# Altium PCB mchf_pro_ui.PcbDoc (part 7 of 7)
Units mil, origin at the board's own origin, x right, y up, seen from the top; angles counter-clockwise.
Board outline 7877.73 x 5661.04 mil, 2 copper layers (Top Layer, Bottom Layer); 345 components, 345 nets, 1318 pads, 783 vias.
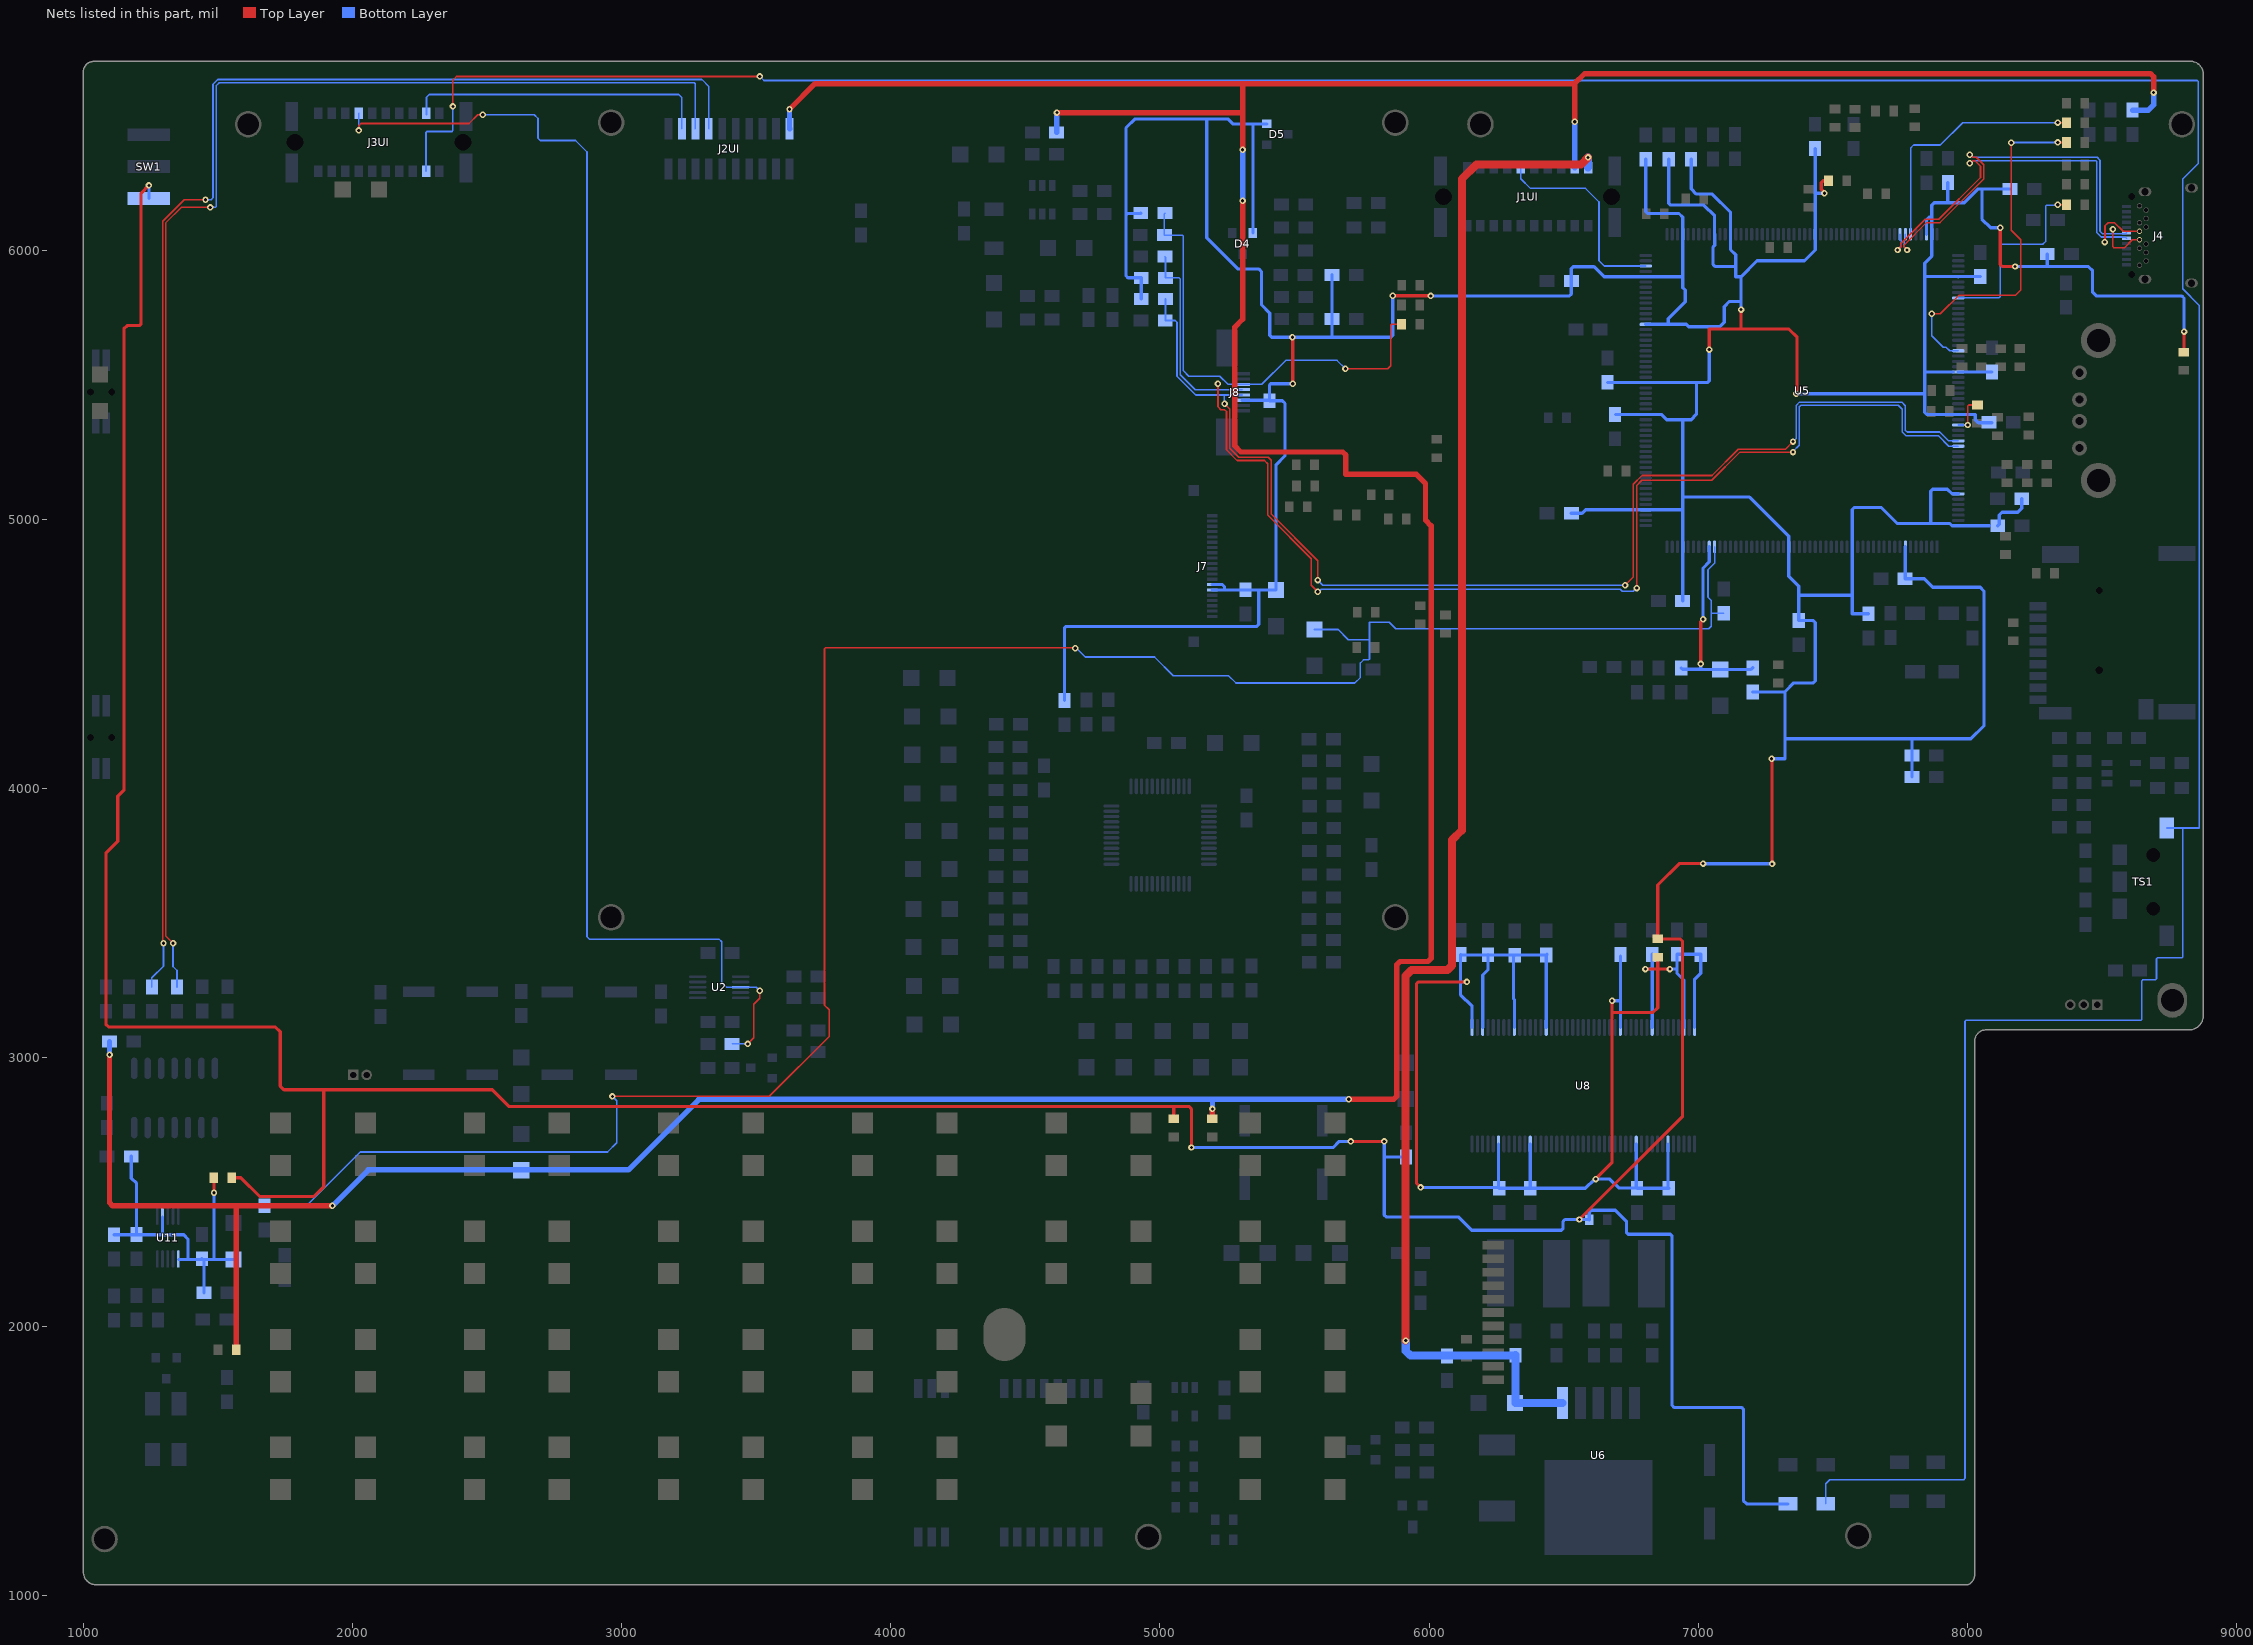
[diagram p6: the nets of this part, all layers, seen from the top]

## Via types
v1: diameter 24, hole 12, Top Layer to Bottom Layer, 779 vias
v2: diameter 30, hole 15, Top Layer to Bottom Layer, 4 vias

## Nets (pads, with @x,y where several pads share a name; then routed paths per layer and width w, separated by ;. In a path a pad name is that pad's centre, name@x,y a point inside that pad or via, vN(x,y) a via of type N, cw(c..) or ccw(c..) an arc to the next point about the centre after c; other vN are vias at no path point) (continued)
SPK_RET: J3UI.A14 R10.2 U2.3 | length 5050.5
  Top Layer w6: v1(2023.3,6445.41) 2023.35,6445.46 2023.35,6462.89 2031.49,6471.03 2432.65,6471.03 2465.55,6503.94 v1(2484.25,6503.94) ; v1(3468.5,3051.18) 3491.06,3073.74 3491.06,3198.94 3512.8,3220.67 v1(3512.8,3249.02)
  Bottom Layer w6: J3UI.A14@2023.03,6509.84 2023.3,6509.57 v1(2023.3,6445.41) ; v1(2484.25,6503.94) 2675.2,6503.94 2689.2,6489.94 2689.2,6416.47 2697.83,6407.83 2828.37,6407.83 2871.06,6365.13 2871.06,3449.33 2879.59,3440.8 3361.82,3440.8 3372.24,3430.38 3372.24,3279.33 3389.76,3261.81 U2.3@3441.93,3261.81 3499.74,3261.81 3512.54,3249.02 v1(3512.8,3249.02) ; R10.2@3410.43,3051.18 v1(3468.5,3051.18)
SWCLK: M3.2 U5.165 | length 734.3
  Top Layer w6: v1(8335.63,6169.58) M3.2@8368.61,6169.58
  Bottom Layer w6: U5.165@7966.5,5823.4 8117.64,5823.4 8122.03,5827.79 8122.03,6018.52 8125.55,6022.03 8279.95,6022.03 8290.74,6032.82 8290.74,6164.43 8294.26,6167.94 8333.99,6167.94 v1(8335.63,6169.58)
SWDIO: M3b.2 U5.151 | length 939
  Top Layer w6: v1(8335.63,6474.41) M3b.2@8368.61,6474.41
  Bottom Layer w6: U5.151@7789.34,6059.62 7789.34,6380.37 7800.2,6391.23 7899.65,6391.23 7982.82,6474.41 v1(8335.63,6474.41)
SWO: M24.2 U5.189 | length 143.3
  Top Layer w6: v1(8001.29,5350.96) 8001.29,5421.81 8004.81,5425.32 M24.2@8037.52,5425.32
  Bottom Layer w6: U5.189@7966.5,5350.96 v1(8001.29,5350.96)
TOUCH_INT: C50.1 J8.6 M11.1 R49.2 | length 1692.5
  Top Layer w6: v1(5689.32,5559.58) 5846.71,5559.58 5857.85,5570.72 5857.85,5721.46 5861.37,5724.98 M11.1@5897.53,5724.98
  Bottom Layer w6: R49.2@5018.7,6138.05 5016.73,6136.08 C50.1@5016.73,6056.35 5083.74,6056.35 5087.25,6052.84 5087.25,5552.74 5107.42,5532.58 5222.5,5532.58 5253.11,5501.97 J8.6@5306.22,5501.97 5378.09,5501.97 5466.96,5590.84 5658.07,5590.84 v1(5689.32,5559.58)
TOUCH_SCK: C49.2 J8.4 R47.2 U5.192 | length 4549.6
  Top Layer w6: v1(5240.06,5429.7) 5240.06,5429.51 5259.14,5410.44 5259.14,5265 5293.06,5231.07 5401.93,5231.07 5413.34,5219.66 5413.34,5020.17 5586.61,4846.9 v1(5586.61,4774.61) ; v1(6728.35,4755.91) 6758.37,4785.93 6758.37,5130.31 6791.45,5163.39 7051.08,5163.39 7148.71,5261.01 7323.99,5261.01 v1(7352.25,5289.28)
  Bottom Layer w6: R47.2@5020.77,5819.14 5020.77,5739.68 C49.2@5020.09,5739 5056.59,5739 5063.25,5732.34 5063.25,5532.58 5133.23,5462.6 5239.47,5462.6 ; v1(5240.06,5429.7) 5239.47,5430.29 5239.47,5462.6 ; J8.4@5306.22,5462.6 5239.47,5462.6 ; v1(5586.61,4774.61) 5605.32,4755.91 v1(6728.35,4755.91) ; v1(7352.25,5289.28) 7363.95,5300.97 7363.95,5423.28 7376.7,5436.02 7756.27,5436.02 7769.65,5422.65 7769.65,5331.28 7776.12,5324.81 7897.53,5324.81 7927.08,5295.26 7930.43,5291.91 U5.192@7966.5,5291.91
TOUCH_SDA: C48.2 J8.5 R48.2 U5.193 | length 4855.4
  Top Layer w6: v1(5215.6,5504.01) 5215.6,5418.51 5226.12,5407.98 5240.03,5407.98 5247.14,5400.88 5247.14,5258.62 5286.68,5219.07 5388.45,5219.07 5400.41,5207.11 5400.41,5016.13 5562.32,4854.22 5562.32,4755.59 v1(5586.61,4731.3) ; v1(6771.49,4745.1) 6771.49,5126.46 6790.67,5145.64 7050.3,5145.64 7153.68,5249.01 7351.09,5249.01 v1(7352.25,5250.18)
  Bottom Layer w6: C48.2@5018.7,5976.69 5020.67,5974.73 R48.2@5020.67,5897.83 5070.81,5897.83 5075.25,5893.38 5075.25,5537.78 5130.75,5482.28 5214.57,5482.28 ; v1(5215.6,5504.01) 5215.6,5483.32 5214.57,5482.28 ; J8.5@5306.22,5482.28 5214.57,5482.28 ; v1(5586.61,4731.3) 5589.94,4731.3 5599.13,4740.49 6710.8,4740.49 6717.93,4733.36 6758.98,4733.36 6770.72,4745.1 v1(6771.49,4745.1) ; v1(7352.25,5250.18) 7352.25,5252.19 7375.95,5275.89 7375.95,5418.31 7381.67,5424.02 7743.49,5424.02 7757.65,5409.87 7757.65,5324.81 7770.87,5311.59 7891.49,5311.59 7930.86,5272.22 U5.193@7966.5,5272.22
TX_CLK_N: J2UI.A8 M58.1 | length 5471
  Top Layer w6: v1(1333.09,3425.42) 1306.68,3451.83 1306.68,6103.08 1363.05,6159.45 v1(1471.47,6159.45)
  Bottom Layer w6: v1(1333.09,3425.42) 1333.09,3339.02 1347.8,3324.31 M58.1@1347.8,3262.67 ; v1(1471.47,6159.45) 1472.38,6160.35 1490.78,6160.35 1494.3,6163.87 1494.3,6612.23 1504.74,6622.68 3270.07,6622.68 3273.58,6619.16 3273.58,6452.21 J2UI.A8@3273.82,6451.97
TX_CLK_P: J2UI.A7 M57.1 | length 5526.6
  Top Layer w6: v1(1297.57,3425.05) 1294.68,3427.93 1294.68,6108.06 1374.62,6187.99 v1(1453.74,6187.99)
  Bottom Layer w6: M57.1@1254.46,3262.67 1254.46,3296.81 1297.57,3339.91 v1(1297.57,3425.05) ; v1(1453.74,6187.99) 1474.68,6187.99 1481.48,6194.78 1481.48,6616.56 1499.6,6634.68 3298.09,6634.68 3324.02,6608.76 3324.02,6452.17 J2UI.A7@3323.82,6451.97
TX_MIX: J2UI.A9 J3UI.A19 | length 1137
  Bottom Layer w6: J3UI.A19@2274.8,6504.7 2274.8,6568.67 2284.89,6578.75 3211.9,6578.75 3223.14,6567.51 3223.14,6452.64 J2UI.A9@3223.82,6451.97
UI_3V_LO: C54.1 C55.1 M52.2 M54.2 R53.2 R54.2 RFC7.2 U11.1 U11.7 | length 1349.5
  Top Layer w12: v1(1485.21,2498.6) M52.2@1485.21,2554.01
  Bottom Layer w12: R54.2@1113.86,2342.17 1372.61,2342.17 1388.72,2326.06 1388.72,2252.66 1386.37,2250.31 ; M54.2@1177.72,2633.56 1177.86,2633.42 1177.86,2552.55 1197.55,2532.86 R53.2@1197.55,2343.23 ; 1293.72,2344.5 U11.7@1293.72,2407.7 ; U11.1@1353.86,2250.31 1386.37,2250.31 ; RFC7.2@1447.78,2126.54 C54.1@1447.78,2245.33 ; v1(1485.21,2498.6) 1485.21,2250.31 ; C55.1@1557.09,2250.31 1485.21,2250.31 ; 1386.37,2250.31 1440.09,2250.31 C54.1@1440.09,2253.03 1442.8,2250.31 1485.21,2250.31
UI_3V_MCU: C46.2 C47.1 C51.2 Cp7.1 Cp17.1 Cp29.1 Cp49.1 Cp56.1 Cp74.1 Cp80.1 Cp100.1 Cp108.1 Cp114.1 Cp117.1 Cp133.1 Cp155.1 Cp161.1 Cp179.1 Cp187.1 Cp208.1 D4.2 D5.2 D6.1 J7.6 J7.7 J8.3 M0.2 M4.1 M48.1 M49.2 M50.1 M51.1 M52.1 R1a.2 R1b.2 R21a.2 R21b.2 R23a.2 R32.1 R33.1 R35a.2 R47.1 R48.1 R49.1 RFC3.1 SW1.3 U5.7 U5.17 U5.29 U5.49 U5.56 U5.74 U5.80 U5.91 U5.100 U5.108 U5.114 U5.117 U5.133 U5.154 U5.155 U5.161 U5.179 U5.187 U5.202 U5.208 | length 36675.2
  Top Layer w12: v1(1243.5,6241.14) 1243.5,6240.97 1214.16,6211.63 1214.16,5727.28 1207.13,5720.25 1162.18,5720.25 1150.35,5708.43 1150.35,3994.1 1127.95,3971.7 1127.95,3804.13 1083.66,3759.84 1083.66,3124.02 1093.5,3114.17 1713.58,3114.17 1731.3,3096.46 1731.3,2894.68 1745.08,2880.91 1888.78,2880.91 ; M52.1@1551.92,2554.01 1584.77,2554.01 1654.53,2484.25 1856.3,2484.25 1892.72,2520.67 1892.72,2876.97 1888.78,2880.91 ; M51.1@5051.18,2772.92 5051.18,2818.94 ; v1(5117.08,2666.34) 5117.08,2809.75 5107.89,2818.94 5051.18,2818.94 ; v1(5492.13,5676.94) 5493.11,5675.95 v1(5493.11,5504.01) ; v1(5708.66,2688.98) v1(5833.66,2688.98) ; v1(5865.2,5831.34) 5865.42,5831.34 5865.92,5830.84 6005.84,5830.84 v1(6006.34,5830.34) ; v1(6558.45,2398.81) 6942.01,2782.37 6942.01,3431.71 6932.36,3441.36 M50.1@6849.39,3441.36 6849.39,3641.87 6928.93,3721.42 v1(7018,3721.42) ; v1(7041.31,5631.28) 7041.31,5707.66 7159.42,5707.66 ; v1(7159.42,5779.78) 7159.42,5707.66 ; v1(7272.43,4111.12) 7274.39,4109.16 v1(7274.39,3720.11) ; v1@7367.52,5479.05 7367.52,5676.78 7336.65,5707.66 7159.42,5707.66 ; v1(7468.95,6211.95) 7468.95,6215.2 7457.52,6226.62 7457.52,6251.44 7464.55,6258.47 M48.1@7484.06,6258.47 ; v1(8122.03,6083.62) 8122.03,5946.89 8129.06,5939.86 v1(8177.41,5939.86) ; M4.1@8803.95,5621.35 8805.12,5622.52 v1(8805.12,5698.06) ; 1888.78,2880.91 2518.88,2880.91 2580.84,2818.94 5051.18,2818.94
  Bottom Layer w12: SW1.3@1243.5,6192.91 v1(1243.5,6241.14) ; M0.2@4644.93,4327.51 4644.93,4595.52 4651.96,4602.55 5360.52,4602.55 5367.55,4609.58 5367.55,4738.19 ; R49.1@4928.7,6138.05 4927.46,6136.81 4880.99,6136.81 4873.96,6129.78 ; R47.1@4930.77,5819.14 4930.77,5897.72 R48.1@4930.67,5897.83 4880.99,5897.83 4873.96,5904.85 4873.96,6129.78 ; v1(5117.08,2666.34) 5643.7,2666.34 5666.34,2688.98 v1(5708.66,2688.98) ; J7.6@5193.86,4738.19 5239.47,4738.19 ; J7.7@5193.86,4757.87 5232.44,4757.87 5239.47,4750.84 5239.47,4738.19 ; J8.3@5306.22,5442.91 5405.49,5442.91 C51.2@5407.19,5441.21 ; D4.2@5345.67,6064.33 5345.67,6469.69 ; D5.2@5396.65,6469.69 5345.67,6469.69 ; v1(5493.11,5504.01) 5411.52,5504.01 5407.19,5499.69 C51.2@5407.19,5441.21 ; R21b.2@5639.62,5908.81 R21a.2@5639.62,5744.66 5639.62,5679.84 5636.72,5676.94 ; v1(5833.66,2688.98) 5833.66,2628.42 ; v1(5865.2,5831.34) 5865.42,5831.12 5865.42,5683.97 5858.39,5676.94 5636.72,5676.94 ; R35a.2@5913.61,2631.32 5836.56,2631.32 5833.66,2628.42 ; v1(6006.34,5830.34) 6521.64,5830.34 6528.67,5837.37 Cp100.1@6528.67,5885.3 6528.67,5931.97 6535.7,5939 6613.26,5939 6650.11,5902.14 U5.100@6805.08,5902.14 6942.73,5902.15 6942.88,5902.3 ; Cp56.1@6528.67,5023 6568.7,5023 6581.7,5036 U5.56@6805.08,5036 6942.88,5036 ; M49.2@6595.19,2398.33 M49.2@6595.19,2398.81 ; Cp80.1@6663.76,5508.44 U5.80@6805.08,5508.44 6993.52,5508.44 ; Cp74.1@6692.27,5390.33 U5.74@6805.08,5390.33 6863.45,5390.33 6883.13,5370.65 6939.34,5370.65 ; U5.91@6805.08,5724.98 6888.62,5724.98 ; Cp108.1@6805.08,6338.18 6805.43,6337.84 6805.43,6143.84 6812.46,6136.81 6928.69,6136.81 6942.88,6122.62 U5.108@6942.88,6059.62 6942.88,5902.3 ; Cp114.1@6890.52,6338.18 6890.52,6174.97 6897.55,6167.94 7021.37,6167.94 7060.99,6128.32 U5.114@7060.99,6059.62 7061.08,6059.53 7061.08,6018.68 7055.18,6012.78 7055.18,5947.04 7062.21,5940.01 7139.73,5940.01 ; Cp49.1@6942.88,4698.22 U5.49@6942.88,4898.21 6942.88,5036 ; Cp117.1@6973.84,6338.18 6973.84,6228.69 6993.52,6209 7052.34,6209 7120.05,6141.3 U5.117@7120.05,6059.62 7120.05,6002.78 7139.73,5983.1 7139.73,5940.01 ; v1(7018,3721.42) 7018.65,3720.76 7273.74,3720.76 v1(7274.39,3720.11) ; v1@7041.31,5626.55 7041.31,5515.47 7034.28,5508.44 6993.52,5508.44 ; v1(7159.42,5779.78) 7159.42,5809.78 ; RFC3.1@7202.53,4358.59 7321.09,4358.59 7322.48,4359.98 ; v1(7272.43,4111.12) 7322.48,4111.12 7322.48,4184.78 ; D6.1@7334.14,1342.06 7180.63,1342.06 7168.16,1354.53 7168.16,1693.76 7161.13,1700.79 6909.89,1700.79 6902.86,1707.82 6902.86,2337.21 6895.83,2344.24 6740.39,2344.24 6733.36,2351.27 6733.36,2393 6692.54,2433.83 6692,2433.29 6602.45,2433.29 6595.19,2426.02 M49.2@6595.19,2398.81 ; v1@7364.79,5467.05 7841.36,5467.05 ; Cp133.1@7434.45,6378.31 7435.01,6377.75 U5.133@7435.01,6059.62 7435.01,6001.13 7395.08,5961.21 7218.48,5961.21 7159.42,5902.14 ; 7435.38,6211.95 v1(7468.95,6211.95) ; Cp17.1@7632.78,4649.9 7572.8,4649.9 7572.8,4717.96 ; U5.7@7769.65,4898.21 7769.65,4780.5 Cp7.1@7768.8,4779.64 7839.87,4779.64 7871.62,4747.89 8048,4747.89 8062.01,4733.89 8062.01,4233.72 8013.07,4184.78 7794.47,4184.78 ; R1b.2@7794.47,4043.17 R1a.2@7794.47,4123.12 7794.47,4184.78 ; U5.154@7848.39,6059.62 7848.39,6113.19 7857.82,6122.62 7868.08,6122.62 ; Cp155.1@7927.63,6251.71 7927.63,6183.86 7920.6,6176.83 ; U5.179@7948.88,5547.72 7841.36,5547.72 ; U5.202@7966.5,5095.06 7966.41,5095.15 7943.05,5095.15 7925.62,5112.58 7871,5112.58 7863.97,5105.55 7863.97,4984.93 ; U5.179@7966.5,5547.81 Cp179.1@8091.98,5547.81 ; Cp161.1@8048.11,5902.24 7966.59,5902.24 U5.161@7966.5,5902.14 7966.34,5902.3 7841.36,5902.3 ; 8082.58,4976.95 U5.208@7966.5,4976.95 7943.15,4976.95 7935.17,4984.93 7863.97,4984.93 ; Cp187.1@8091.98,5359.39 8040.98,5359.39 8029.72,5370.65 8029.72,5390.33 7848.39,5390.33 7841.36,5397.36 7841.36,5467.05 ; Cp208.1@8113.02,4976.72 8118.52,4982.23 8118.52,5016.54 8128.77,5026.78 8187.52,5026.78 8202.16,5041.42 R33.1@8202.16,5077 ; v1(8122.03,6083.62) 8086.55,6083.62 8054.23,6115.95 8054.23,6228.16 ; R32.1@8158.41,6228.16 8054.23,6228.16 ; v1(8177.41,5939.86) 8297.48,5939.86 ; R23a.2@8296.96,5986.02 8296.96,5940.39 8297.48,5939.86 ; v1(8805.12,5698.06) 8805.12,5822.85 8798.09,5829.88 8480.16,5829.88 8465.55,5844.49 8465.55,5924.21 8449.9,5939.86 8297.48,5939.86 ; 4873.96,6129.78 4873.96,6454.66 4907.48,6488.19 5174.15,6488.19 ; 5174.15,6488.19 5174.15,6047.07 5291.14,5930.08 5368.36,5930.08 5377.33,5921.11 5377.33,5797.24 5408.03,5766.55 5408.03,5683.97 5415.06,5676.94 v1(5492.13,5676.94) 5636.72,5676.94 ; 5174.15,6488.19 5251.69,6488.19 5270.19,6469.69 5345.67,6469.69 ; 5239.47,4738.19 5367.55,4738.19 ; 5367.55,4738.19 C47.1@5431.4,4738.19 5431.4,5203.7 5464.57,5236.87 5464.57,5430.97 5454.34,5441.21 C51.2@5407.19,5441.21 ; 5833.66,2628.42 5833.66,2415.36 5840.69,2408.33 6108.81,2408.33 6157.88,2359.25 6490.82,2359.25 6497.85,2366.28 6497.85,2391.78 6504.88,2398.81 v1(6558.45,2398.81) M49.2@6595.19,2398.81 ; 6888.62,5724.98 6888.62,5746.02 6951.49,5808.89 6951.49,5852.47 6942.88,5861.08 6942.88,5902.3 ; 6888.62,5724.98 6955.86,5724.98 6964.63,5716.21 7080.68,5716.21 7096.6,5732.13 7096.6,5790.7 7115.68,5809.78 7159.42,5809.78 ; 6939.34,5370.65 6942.88,5367.11 6942.88,5083.22 ; 6939.34,5370.65 6973.84,5370.65 6993.52,5390.33 6993.52,5508.44 ; 6942.88,5036 6942.88,5083.22 ; 6942.88,5083.22 7191.09,5083.22 7336.58,4937.72 U5.29@7336.58,4898.21 7336.65,4898.14 7336.65,4788.94 7373.92,4751.66 7373.92,4714 ; 7139.73,5940.01 7139.73,5902.14 7159.42,5902.14 ; 7159.42,5809.78 7159.42,5902.14 ; 7322.48,4184.78 7794.47,4184.78 ; 7322.48,4184.78 7322.48,4359.98 ; 7322.48,4359.98 7355.28,4392.78 7427.98,4392.78 7435.01,4399.81 7435.01,4617.07 7427.98,4624.1 Cp29.1@7373.7,4624.1 7373.7,4692.79 7373.92,4693.01 7373.92,4714 ; 7373.92,4714 7377.88,4717.96 7572.8,4717.96 ; 7572.8,4717.96 U5.17@7572.8,4898.21 7572.8,5036.91 7580.18,5044.29 7680.09,5044.29 7739.45,4984.93 7863.97,4984.93 ; 7841.36,5467.05 7841.36,5547.72 ; 7841.36,5547.72 7841.36,5902.3 ; 7841.36,5902.3 7841.36,5951.95 7868.08,5978.66 7868.08,6122.62 ; 7868.08,6122.62 7868.08,6167.94 7876.96,6176.83 7920.6,6176.83 ; 7920.6,6176.83 7988.78,6176.83 8040.12,6228.16 8054.23,6228.16
  other v1: 7364.79,5467.84
UI_3V_SDRAM: Cr1.1 Cr3.1 Cr9.1 Cr15.1 Cr29.1 Cr35.1 Cr41.1 Cr43.1 Cr49.1 Cr55.1 Cr75.1 Cr81.1 M50.2 U8.1 U8.3 U8.9 U8.15 U8.29 U8.35 U8.41 U8.43 U8.49 U8.55 U8.75 U8.81 | length 6435.2
  Top Layer w12: v1(5968.58,2518) 5953.21,2533.37 5953.21,3274.57 5960.24,3281.6 v1(6140.52,3281.6) ; v1(6619.17,2549.21) 6619.17,2550.04 6680.08,2610.94 6680.08,3170.26 ; v1(6680.08,3211.95) 6680.08,3170.26 ; v1(6803.85,3329.51) 6803.92,3329.44 6849.39,3329.44 ; M50.2@6849.39,3373.86 6849.39,3329.44 ; v1(6894.85,3329.44) 6849.39,3329.44 ; 6680.08,3170.26 6682.23,3168.11 6831.89,3168.11 6849.39,3185.6 6849.39,3329.44
  Bottom Layer w12: v1(5968.58,2518) 6257.85,2518 Cr81.1@6260.62,2515.23 6258.12,2517.73 U8.81@6258.12,2679.53 ; v1(6140.52,3281.6) 6116.3,3281.6 ; U8.1@6159.69,3112.61 6159.69,3191.07 6116.3,3234.46 6116.3,3281.6 ; U8.3@6199.06,3112.61 6199.06,3307.29 6218.97,3327.2 Cr3.1@6218.97,3381.64 ; Cr3.1@6218.97,3382.49 Cr3.1@6218.97,3381.64 ; Cr81.1@6260.84,2515.23 Cr75.1@6376,2515.23 6580.87,2515.23 6614.85,2549.21 v1(6619.17,2549.21) 6671.3,2549.21 6704.43,2516.09 Cr55.1@6772.12,2516.09 ; U8.9@6317.17,3112.61 6317.17,3216.13 6314.01,3219.29 6314.01,3376.28 Cr9.1@6318.52,3380.78 ; Cr75.1@6376.23,2516.09 U8.75@6376.23,2679.53 ; U8.15@6435.28,3112.61 6435.28,3381.42 Cr15.1@6435.5,3381.64 ; Cr15.1@6438.65,3384.78 Cr15.1@6435.5,3381.64 ; v1(6680.08,3211.95) 6706.36,3211.95 6710.87,3207.44 ; U8.29@6710.87,3112.61 6710.87,3207.44 ; Cr29.1@6710.87,3378.35 6710.87,3207.44 ; U8.55@6769.93,2679.53 6769.93,2518.28 Cr55.1@6772.12,2516.09 ; v1(6803.85,3329.51) 6828.98,3329.51 ; U8.35@6828.98,3112.61 6828.98,3329.51 ; Cr35.1@6828.98,3384.78 6828.98,3329.51 ; Cr49.1@6888.04,2517.81 U8.49@6888.04,2679.53 ; Cr49.1@6890.61,2515.23 6772.98,2515.23 Cr55.1@6772.12,2516.09 ; v1(6894.85,3329.44) 6921.23,3329.44 6921.3,3329.51 ; U8.41@6947.09,3112.61 6947.09,3288.38 6921.3,3314.18 6921.3,3329.51 ; U8.43@6986.46,3112.61 6986.46,3291.34 7009.3,3314.18 7009.3,3384.78 Cr41.1@6921.52,3384.78 6921.3,3384.78 6921.3,3329.51 ; 6116.3,3281.6 Cr1.1@6116.3,3383.93 6118.59,3381.64 Cr3.1@6218.97,3381.64 ; Cr3.1@6218.97,3381.64 Cr15.1@6435.5,3381.64
USART2_TX: M3a.2 U5.175 | length 1337.5
  Top Layer w6: v1(7868.08,5764.35) 7899.86,5764.35 7968.99,5833.48 8179.31,5833.48 8198.41,5852.58 8198.41,6039.3 8163.2,6074.51 v1(8163.2,6399.24) ; v1(8335.63,6400.77) M3a.2@8368.61,6400.77
  Bottom Layer w6: v1(7868.08,5764.35) 7868.08,5682.73 7910.48,5640.33 7920.78,5640.33 7934.56,5626.55 U5.175@7966.5,5626.55 ; v1(8163.2,6399.24) 8164.73,6400.77 v1(8335.63,6400.77)
USB_DFU_N: J4.A7 J4.B7 U5.149 | length 1673.8
  Top Layer w6: v1(7740.72,6001.21) 7740.72,6002.02 7752.42,6013.72 7752.42,6024.1 7843.27,6114.95 7893.75,6114.95 8049.06,6270.27 8049.06,6312.45 8028.23,6333.29 8021.07,6333.29 8011.05,6323.26 v1(8008.56,6323.26) ; v1(8510.83,6030.51) 8511.67,6031.35 8511.67,6091.1 8523.11,6102.55 8547.02,6102.55 8578.9,6070.68 J4.B7@8639.72,6070.68
  Bottom Layer w6: v1(7740.72,6001.21) 7740.72,6002.02 7752.42,6013.72 7752.42,6025.61 7753.81,6027 7753.81,6036.49 7749.97,6040.33 U5.149@7749.97,6059.62 ; v1(8008.56,6323.26) 8011.05,6323.26 8021.07,6333.29 8477.22,6333.29 8480.74,6329.77 8480.74,6066.21 8497.37,6049.58 8510.83,6049.58 ; v1(8510.83,6030.51) 8510.83,6049.58 ; J4.A7@8591.18,6045.08 8588.27,6047.98 8574.87,6047.98 8573.27,6049.58 8510.83,6049.58
USB_DFU_P: J4.A6 J4.B6 U5.150 | length 1660.9
  Top Layer w6: v1(7776.12,6001.13) 7776.12,6001.95 7764.42,6013.65 7764.42,6019.13 7848.24,6102.95 7898.72,6102.95 8061.06,6265.29 8061.06,6317.42 8033.2,6345.29 8021.07,6345.29 8011.05,6355.31 v1(8008.56,6355.31) ; v1(8540.99,6078.14) 8540.99,6013.5 8544.51,6009.98 8583.71,6009.98 8613.04,6039.3 8639.6,6039.3 J4.B6@8639.72,6039.18
  Bottom Layer w6: U5.150@7769.65,6059.62 7769.65,6040.33 7765.81,6036.49 7765.81,6022.03 7764.42,6020.64 7764.42,6013.65 7776.12,6001.95 v1(7776.12,6001.13) ; v1(8008.56,6355.31) 8011.05,6355.31 8021.07,6345.29 8482.19,6345.29 8492.74,6334.74 8492.74,6071.18 8502.34,6061.58 8541.13,6061.58 ; v1(8540.99,6078.14) 8541.13,6078 8541.13,6061.58 ; J4.A6@8591.18,6064.76 8588.27,6061.86 8573,6061.86 8572.72,6061.58 8541.13,6061.58
VBAT: D7.1 J3UI.A9 TS1.e | length 13691.2
  Top Layer w6: v1(2373.06,6534.46) 2373.06,6632.69 2386.04,6645.67 3512.64,6645.67 v1(3513.27,6646.3)
  Bottom Layer w6: J3UI.A9@2273.03,6293.31 2273.03,6437.77 2276.55,6441.29 2369.55,6441.29 2373.06,6444.8 v1(2373.06,6534.46) ; v1(3513.27,6646.3) 3528.74,6630.82 8854.28,6630.82 8857.8,6627.31 8857.8,6322.36 8800.29,6264.86 8800.29,5856.85 8862.1,5795.04 8862.1,3853.54 8800.2,3853.54 ; D7.1@7473.63,1342.06 7473.63,1417.53 7488.4,1432.29 7986.17,1432.29 7991.1,1437.23 7991.1,3135.24 7995.66,3139.8 8645.11,3139.8 8648.62,3143.31 8648.62,3285.75 8652.14,3289.26 8699.24,3289.26 8702.76,3292.78 8702.76,3367.58 8706.27,3371.09 8796.68,3371.09 8800.2,3374.61 8800.2,3853.54 ; TS1.e@8741.14,3853.54 8800.2,3853.54
VCC_5V_ON: J1UI.A6 U5.102 | length 768.2
  Bottom Layer w6: J1UI.A6@6341.04,6307.32 6341.04,6265.68 6376.72,6230 6581.02,6230 6631.36,6179.67 6631.36,5960.81 6650.66,5941.51 U5.102@6805.08,5941.51
VCC_5V_RF: J1UI.A2 J2UI.A1 M2.1 M53.2 M59.2 R16.1 RFC2.1 RFC5.1 | length 17191.5
  Top Layer w20: v1(1097.05,3010.83) 1096.94,3010.72 1096.94,2461.52 1108.65,2449.8 1567.48,2449.8 ; M59.2@1567.48,1915.07 1567.48,2449.8 ; v1(1925.2,2449.8) 1567.48,2449.8 ; v1(3623.53,6524.07) 3718.55,6619.09 5307.09,6619.09 ; v1(4617.13,6511.81) 5307.09,6511.81 ; M2.1@5194.67,2772.92 5194.88,2773.14 5194.88,2809.53 v1(5195.1,2809.75) ; v1@5307.09,6180.12 5307.09,5743.93 5278.14,5714.98 5278.14,5272.87 5300.36,5250.64 5679.3,5250.64 5691.02,5238.93 5691.02,5167.66 5952.53,5167.66 5986.61,5133.59 5986.61,4997.64 6007.87,4976.38 6007.87,3369.32 5996.16,3357.6 5892.05,3357.6 5880.34,3345.88 5880.34,2857.19 5868.62,2845.47 v1(5701.77,2845.47) ; v1(5307.09,6374.02) 5307.09,6511.81 ; v1(6541.04,6477.41) 6540.86,6477.59 6540.86,6619.09 ; v1(8692.15,6585.95) 8692.15,6644.88 8680.44,6656.59 6578.53,6656.59 6541.04,6619.09 6540.86,6619.09 ; 5307.09,6511.81 5307.09,6619.09 ; 5307.09,6619.09 6540.86,6619.09
  Bottom Layer w20: v1(1097.05,3010.83) M53.2@1097.05,3059.79 ; v1(1925.2,2449.8) 2058.93,2583.53 3024.91,2583.53 3286.85,2845.47 5195.1,2845.47 ; v1(3623.53,6524.07) 3623.53,6452.26 J2UI.A1@3623.82,6451.97 ; RFC5.1@4616.04,6437.68 4616.58,6438.22 4616.58,6511.27 v1(4617.13,6511.81) ; v1(5195.1,2809.75) 5195.1,2845.47 ; v1(5307.09,6184.43) v1(5307.09,6374.02) ; v1(5701.77,2845.47) 5195.1,2845.47 ; J1UI.A2@6541.04,6307.32 v1(6541.04,6477.41) ; RFC2.1@8613.84,6520.81 8672.5,6520.81 8692.15,6540.46 v1(8692.15,6585.95)
VCC_20V: C34.1 C35.1 J1UI.A1 R39.2 U6.1 | length 5825.7
  Top Layer w30: v1@5912.53,1948.82 5912.53,3303.36 5934.59,3325.42 6067.88,3325.42 6085.45,3342.99 6085.45,3808.74 6121.65,3844.94 6121.65,6264.37 6176.73,6319.45 6565.23,6319.45 v1(6590.79,6345.01)
  Bottom Layer w30: v1(5913.39,1948.82) 5913.39,1910.89 5930.96,1893.32 6320.04,1893.32 C34.1@6320.95,1894.23 ; C34.1@6321.49,1894.77 C34.1@6320.95,1894.23 ; U6.1@6495.47,1717.52 6320.95,1717.52 C34.1@6320.95,1894.23 ; v1(6590.79,6345.01) 6590.79,6307.57 J1UI.A1@6591.04,6307.32
VDDA: Cp44.1 CP44E.1 RFC3.2 U5.44 | length 738.7
  Top Layer w12: v1@7009.84,4463.38 7009.84,4620.92 v1(7018,4629.12) v1(7018,4629.12)
  Bottom Layer w12: Cp44.1@6937.01,4447.83 6941.75,4443.09 7009.73,4443.09 ; v1(7009.52,4463.38) 7009.73,4463.17 7009.73,4442.63 7196.57,4442.63 RFC3.2@7202.53,4448.59 ; v1(7018,4629.12) 7018,4819.68 7041.31,4842.99 U5.44@7041.3,4898.21
VREF+: CP43.2 CP43E.1 M60.1 U5.43 | length 8075.9
  Top Layer w6: v1(2965.55,2856.3) 3548.02,2856.3 3770.79,3079.07 3770.79,3178.27 3753.76,3195.29 3753.76,4519.68 3757.28,4523.2 4683.07,4523.2 v1(4685.08,4521.19)
  Bottom Layer w6: M60.1@1673.23,2449.8 1828.9,2449.8 2028.59,2649.49 2947.25,2649.49 2981.29,2683.52 2981.29,2840.56 v1(2965.55,2856.3) ; v1(4685.08,4521.19) v1(4685.08,4521.19) 4690.1,4521.24 4722.57,4488.78 4980.16,4488.78 5049.36,4419.57 5255.12,4419.57 5282.3,4392.39 5724.36,4392.39 5744.99,4413.03 5744.99,4466.53 5756.46,4478 5775.05,4478 5778.56,4481.51 5778.56,4553.15 5778.56,4617.93 5852.27,4617.93 5876.55,4593.65 7039.52,4593.65 7048.57,4602.71 7048.57,4651.13 ; CP43E.1@5573.69,4591.19 5662.06,4591.19 5700.1,4553.15 5778.21,4553.15 ; U5.43@7060.99,4898.21 7060.99,4838.14 7036.25,4813.4 7036.25,4711.02 7048.57,4698.7 7048.57,4651.13 ; CP43.2@7094.83,4651.65 7049.09,4651.65 7048.57,4651.13
pads on no net: J1UI.MH1 J1UI.MH2 J3UI.MH1 J3UI.MH2 J4.A2 J4.A3 J4.A4 J4.A8 J4.A9 J4.A10 J4.B4 J4.MH1 J4.MH2 J6.NPTH1 J6.NPTH2 J7.1 J7.3 J7.5 J7.MP1 J7.MP2 J8.2 J8.MP1 J8.MP2 M46.1 M51a.1 M51b.1 M51f.2 S0.1 S0.2 S1.1 S2.1 S3.1 S4.1 S5.1 S6.1 S6.2 S7.1 S8.1 S9.1 S10.1 S11.1 S12.1 S12.2 S13.1 S14.1 S15.1 S16.1 S17.1 S18.1 S18.2 S19.1 S20.1 S21.1 S22.2 S22.3 S22.NPTH1 S23.1 S24.1 S24.4 S24.NPTH1 TS1.a TS1.NPTH1 TS1.NPTH2 U1.40 U1.47 U1.48 U2.7 U3.4 U3.5 U3.9 U3.10 U4.3 U5.19 U8.14 U8.30 U8.57 U8.69 U8.70 U8.73 U9.3 U11.3 U13.1 Y1.2 Y1.3

## Polygon pours and split planes (outlines as drawn)
GND on Top Layer "top" (solid, remove dead copper, pour order 6): 999.47,6702.43 1000.01,1041.39 8874,1041.39 8877.01,6701.98
GND on Bottom Layer "bottom" (solid, remove dead copper, pour order 4): 999.57,6677.16 1020.44,6701.92 8877.01,6701.92 8877.22,1041.39 999,1041.39

## Keep-outs
Top Layer:
  lines w5: 1362.49,3464.03 1362.49,6099.48 ; 1362.53,6100.14 cw(c1401.41,6099.65) 1401.9,6138.52 ; 1362.69,3464.87 ccw(c1401.57,3464.38) 1401.07,3425.5 ; 1400.96,3425.56 2768.5,3425.56 ; 1401.52,6138.52 2768.4,6138.52 ; 2768,3425.36 ccw(c2768.5,3464.24) 2807.37,3463.75 ; 2768.89,6138.56 cw(c2768.4,6099.68) 2807.28,6099.19 ; 2807.26,3464.24 2807.26,6099.68 ; 7885.4,1607.07 7885.4,2512.89 7183.95,2512.89 7183.95,1606.55 7885.78,1606.55
Bottom Layer:
  lines w5: 1362.75,6100.25 cw(c1401.63,6099.76) 1402.12,6138.64 ; 1362.78,3464.23 1362.78,6101.57 ; 1362.87,3464.67 ccw(c1401.75,3464.18) 1401.26,3425.3 ; 1401.26,3425.05 2768.12,3425.05 ; 1401.6,6138.52 2768.4,6138.52 ; 2768.11,3425.39 ccw(c2768.6,3464.27) 2807.48,3463.77 ; 2768.89,6138.56 cw(c2768.4,6099.68) 2807.28,6099.19 ; 2807.26,3463.77 2807.26,6099.68 ; 7184.95,1607 7885.01,1607 7885.01,2512.95 7184.95,2512.95 7184.95,1607
Keep-Out Layer:
  lines w5: 999.49,6661.89 999.58,5699.29 1000,1088.93 ccw(c1047.54,1088.93) 1047.73,1041.39 7999.98,1041.39 ; 999.49,6662.44 cw(c1038.71,6662.76) 1038.39,6701.98 8828.29,6701.98 ; 1362.74,3464.52 ccw(c1401.62,3464.03) 1401.13,3425.15 ; 1362.75,6100.13 cw(c1401.63,6099.64) 1402.12,6138.52 ; 1362.89,3464.79 1362.89,6100.72 ; 1400.69,6138.52 2768.32,6138.52 ; 1402.49,3425.19 1402.73,3425.42 2768.85,3425.42 ; 2767.98,3425.29 ccw(c2768.48,3464.17) 2807.35,3463.67 ; 2768.89,6138.56 cw(c2768.4,6099.68) 2807.28,6099.19 ; 2807.26,3463.83 2807.26,6099.58 ; 3302.69,3516.44 3302.69,6046.03 ; 3302.74,3517.35 ccw(c3341.62,3516.86) 3341.13,3477.98 ; 3302.78,6046.36 cw(c3341.66,6045.87) 3342.15,6084.74 ; 3341.19,3477.94 3665.7,3477.94 ; 3341.6,6084.94 3665.85,6084.94 ; 3664.29,3477.77 ccw(c3664.78,3516.65) 3703.65,3516.16 ; 3665.53,6084.95 cw(c3665.04,6046.07) 3703.91,6045.58 ; 3703.69,3515.92 3703.69,6047.11 ; 7184.95,1647.45 7184.95,2474.88 ; 7185.04,2473.24 cw(c7223.92,2472.74) 7224.41,2511.62 ; 7185.12,1646.98 ccw(c7224,1646.49) 7223.51,1607.61 ; 7221.69,2511.62 7849.36,2511.62 7849.69,2511.29 ; 7224.8,1607.59 7844.41,1607.59 ; 7844.53,1607.82 ccw(c7845.02,1646.7) 7883.9,1646.21 ; 7845.92,2511.85 cw(c7845.43,2472.98) 7884.31,2472.48 ; 7884.17,1647.35 7884.17,2472.48 ; 7999.97,1041.39 ccw(c7988.18,1078.6) 8027.17,1076.79 ; 8027.56,1076.79 8027.56,3061.87 ; 8027.58,3061.87 cw(c8070.02,3061.02) 8070.87,3103.46 8825.65,3103.46 ; 8826.12,3103.72 ccw(c8824.85,3155.22) 8876.34,3156.5 8877.01,6653.11 ; 8828.11,6702.43 cw(c8828.3,6653.51) 8877.22,6653.91 ; 1128.01,1407.65 1128.01,1585.17 1159.57,1585.17 1159.57,1407.65 1128.01,1407.65 ; 1128.01,1643.16 1128.01,1855.08 1159.58,1855.08 1159.58,1643.16 1128.01,1643.16 ; 1183.47,1408.62 1183.47,1440.18 1404.47,1440.18 1404.47,1408.62 1183.47,1408.62 ; 1206.47,1914.38 1206.47,1946.72 1410.32,1946.72 1410.32,1914.38 1206.47,1914.38 ; 1429.76,1408.08 1429.76,1622.52 1461.32,1622.52 1461.32,1408.08 1429.76,1408.08 ; 1429.76,1655.32 1429.76,1864.17 1461.32,1864.17 1461.32,1655.32 1429.76,1655.32 ; 2807.26,4822.59 2807.26,4822.59

## Silkscreen, mask and mechanical layers (free items; w line width, h text height)
Top Overlay:
  circle w31.5: c6191.04,6468.5 r58.49
  circle w31.5: c1612.2,6468.5 r58.49
  circle w31.5: c8797.24,6468.5 r58.49
  circle w31.5: c7594.42,1223.81 r58.49
  circle w31.5: c4956.69,1219.49 r58.49
  circle w31.5: c1078.74,1211.61 r58.49
  circle w31.5: c5874.41,3521.65 r58.49
  circle w31.5: c2960.87,3521.65 r58.49
  circle w31.5: c5874.41,6474.41 r58.49
  circle w31.5: c2960.88,6474.41 r58.49
  lines w10: 2876.97,3522.64 ccw(c2957.18,3522.15) 2956.69,3441.93 5880.91,3441.93 ccw(c5880.41,3523.13) 5961.61,3523.62 5961.61,6475.39 ccw(c5876.48,6473.92) 5875,6559.06 2967.52,6559.06 ccw(c2958.17,6477.85) 2876.97,6487.2 2876.97,3522.64
  lines w15: 1117.04,2874.52 cw(c1210.63,2874.52) 1210.63,2968.11 ; 1117.13,1308.07 1117.13,2875.98 ; 1118.11,1308.07 ccw(c1224.41,1303.15) 1224.41,1196.74 ; 1210.63,2968.5 6136.31,2968.5 ; 1224.41,1196.85 6123.79,1196.85 ; 3613,3469.68 3624.68,3458 8427.49,3458 ; 3613,6093.5 3621.5,6102 8479.51,6102 ; 6123.79,1196.59 ccw(c6123.79,1309.67) 6236.87,1309.67 ; 6135.82,2968.25 cw(c6136.31,2867.55) 6236.65,2859.12 ; 6236.87,1307.09 6236.87,1733.27 ; 6236.87,2372.05 6236.87,2859.25 ; 8428.15,3457.68 ccw(c8426.23,3600.45) 8569,3602.36 ; 8481.3,6102 cw(c8479.51,6013.6) 8567.91,6011.81 ; 8569,3599.51 8569,6013.6
  lines w20: 8142.38,6127.86 8142.38,6593.17 ; 8017.52,6127.38 8567.72,6127.38 8567.72,6592.69 8017.52,6592.69 8017.52,6127.38
  lines w39.37: 1036.42,6670.28 8830,6673.23 ; 1066.93,1070.87 7980.31,1072.83
  lines w50: 6711.36,2387.95 cw(c7535.43,2062.99) 7988.71,2824.06 ; 6719.96,1718.02 ccw(c7535.43,2063.98) 7993.27,1305.64
  text "PHOLD" at 8166.97,6530.71 h32
  text "SWDIO" at 8167.3,6459.13 h32
  text "TX" at 8173.53,6382.63 h32
  text "NRST" at 8176.99,6300.94 h32
  text "options" at 8114.5,6268.05 h32 r90
  text "CPU debug" at 8069.97,6239.25 h32 r90
  text "BOOT0" at 8171.11,6226.86 h32
  text "SWCLK" at 8169.72,6153.13 h32
  text "1(160m)" at 2519,2824 h32
Bottom Overlay:
  circle w20: c8761.69,3213.44 r95.61
  lines w10: 2898.62,6478.35 2898.62,3528.54 ccw(c2963.58,3521.65) 2956.69,3456.69 3913.24,3456.69 ; 2898.62,6479.95 cw(c2960.52,6479.44) 2961.03,6541.34 5882.87,6541.34 ; 5796.62,3455.91 5888.9,3455.91 ; 5883.07,6540.91 cw(c5877.44,6475.85) 5942.51,6470.22 ; 5886.64,3455.91 ccw(c5882.55,3516.14) 5942.78,3520.24 ; 5942.31,3510.18 5942.31,6486.1
  lines w20: 3693.16,1529.94 3694.24,1528.86 ; 2126.08,1529.65 2126.08,1795.28 3694.08,1795.28 3694.08,1529.65 2126.08,1529.65
  lines w39.37: 1038.39,6668.31 8828,6673.23 ; 1062.01,1074.8 7992.13,1074.8
  text "Paddles" at 8292.11,3179.92 h32
  text "mcHF QRP Transceiver" at 2797.24,1722.44 h32
  text "UI board, rev 0.8.5, Krassi Atanassov, M0NKA" at 3553.15,1647.64 h32
  text "20 Nov 2024" at 3636.81,1584.65 h32
  text "www.m0nka.co.uk" at 2616.14,1577.76 h32
Mechanical 1:
  circle w10: c7534.53,2062.64 r145.67
  lines w5: 1118,1480.85 6233,1480.85 ; 1119,2685 6236,2685 ; 1120,2283.85 6235,2283.85 ; 1120.11,1881.85 6236,1881.85 ; 1895.28,1197.85 1895.28,2968 ; 2615.75,1197.85 2615.75,2968 ; 3336.22,1198 3336.22,2967.5 ; 4056.73,1198.85 4056.73,2968 ; 4777.17,1198.85 4777.17,2968 ; 5497.64,1199.85 5497.64,2968 ; 1000,1041.39 8875.95,1041.39 8875.95,6702.76 1000,6702.76 1000,1041.39
  lines w6: 7892.12,1607.34 7178.31,1607.34 7178.31,2518.62 7892.41,2518.62 ; 7892.5,1607.34 7892.5,2518.62
  lines w10: 1006.88,3870.09 8877.92,3870.09 ; 7178.31,1607.34 7178.31,1804.43 ; 7391.28,2062.64 7680.2,2062.64 ; 7535.53,1709 7535.53,2417.66 ; 7892.5,2321.53 7892.5,2518.62
  text "ToDo: Add testpoints" at 6022.64,6841.54 h32
Mechanical 4:
  lines w10: 1078.74,1212.65 7594.42,1223.81 ; 1612.2,6468.5 8797.24,6468.5
Mechanical 7:
  lines w10: 3609.25,3474.41 3609.25,6093.5
Mechanical 13:
  lines w6: 269.69,6701.77 9000,6701.77 ; 353.35,1041.34 9083.66,1041.34

## Dimensions
4594.49,5787.4 to 3621.5,6102 on Mechanical 7
5135.59,5672.44 to 3609.25,6093.5 on Mechanical 7
4934,4509.86 to 3609.25,3474.41 on Mechanical 7
4606.3,5314.96 to 5130.85,5157.48 on Mechanical 7
1006.88,3870.09 to 1214.57,6311.02 on Mechanical 1
1006.88,3870.09 to 1122.37,5444.69 on Mechanical 1
1006.88,3870.09 to 1122.18,4165.16 on Mechanical 1
8877.92,3870.09 to 8825.65,3103.46 on Mechanical 1
8797.24,6468.5 to 1612.2,6468.5 on Mechanical 4
8797.24,6468.5 to 8875.95,6702.76 on Mechanical 4
8877.92,3870.09 to 8797.24,6468.5 on Mechanical 4
8869.09,3653.54 to 8877.92,3870.09 on Mechanical 4
8877.92,3870.09 to 8875.98,4578.74 on Mechanical 4
8877.92,3870.09 to 8897.82,5405.62 on Mechanical 4
8877.92,3870.09 to 8866.77,6054.92 on Mechanical 4
1078.74,1211.61 to 1000,1088.93 on Mechanical 4
4956.69,1219.49 to 1078.74,1211.61 on Mechanical 4
7594.42,1223.81 to 4956.69,1219.49 on Mechanical 4
1078.74,1212.65 to 1006.88,3870.09 on Mechanical 4
1708.46,6212.6 to 1000,6702.76 on Mechanical 1
1708.46,6212.6 to 1006.88,3870.09 on Mechanical 1
5976.47,6010.08 to 8877.92,3870.09 on Mechanical 1
5874.41,3521.65 to 5874.41,6474.41 on Mechanical 1
2960.88,6474.41 to 5874.41,6474.41 on Mechanical 1
2960.88,6474.41 to 3098.82,6251.97 on Mechanical 1
2960.88,6474.41 to 3098.82,6501.97 on Mechanical 1
2898.62,6478.35 to 1000,6702.76 on Mechanical 1
7388.86,2062.64 to 8026.57,2113.19 on Mechanical 1
7680.2,2062.64 to 8875.95,1041.39 on Mechanical 1
1047.73,1041.39 to 1006.88,3870.09 on Mechanical 1
2404.53,6144.69 to 2445.87,3421.26 on Mechanical 1
2804.13,5402.56 to 1359.25,5361.22 on Mechanical 1
3303.69,5490.94 to 3703.69,5483.94 on Mechanical 1
3462.69,6078.94 to 3468.69,3477.94 on Mechanical 1
8887.8,992.13 to 9083.66,1041.34 on Mechanical 12
8429,6080 to 999.49,6662.44 on Mechanical 1
8318,6075 to 8324,3474 on Mechanical 1
8159,5487 to 8559,5480 on Mechanical 1
7892.5,1607.34 to 8828.11,6702.43 on Mechanical 1
7178.31,1607.34 to 8875.95,1041.39 on Mechanical 1
7178.31,1607.34 to 7892.5,1607.34 on Mechanical 1
7178.31,2518.62 to 7892.12,1607.34 on Mechanical 1
1000,1041.39 to 8875.95,1041.39 on Mechanical 1
8828.3,6702.43 to 7999.98,1041.39 on Mechanical 1
1118.5,2968.5 to 1119,2685 on Mechanical 1
1119,2685 to 1120,2283.85 on Mechanical 1
1120,2283.85 to 1120.11,1881.85 on Mechanical 1
1120.11,1881.85 to 1118,1480.85 on Mechanical 1
1118,1480.85 to 1118.11,1196.85 on Mechanical 1
1895.28,1197.85 to 1118.11,1196.85 on Mechanical 1
1895.28,1197.85 to 2615.75,1197.85 on Mechanical 1
2615.75,1197.85 to 3336.22,1198 on Mechanical 1
3336.22,1198 to 4056.73,1198.85 on Mechanical 1
4056.73,1198.85 to 4777.17,1198.85 on Mechanical 1
4777.17,1198.85 to 5497.64,1199.85 on Mechanical 1
5497.64,1199.85 to 6236,1196.85 on Mechanical 1
1767.72,3330.13 to 1047.73,1041.39 on Mechanical 1

## Text inside footprints (layer, text, board x,y; h text height)
J6: Bottom Overlay "1" at 8248.03,4742.13 h59.06 r180; Mechanical 7 "EDGE" at 8878.94,4876.97 h39.37 r270; Mechanical 7 "PCB" at 8878.94,4185.04 h39.37 r270; Mechanical 4 "1" at 8307.09,4696.85 h59.06 r180; Mechanical 4 "9" at 8305.12,4349.41 h59.06 r180; Mechanical 4 "10" at 8636.81,4336.61 h59.06 r180
TS1: Mechanical 7 "EDGE" at 8846.14,3808.54 h39.37 r270; Mechanical 7 "PCB" at 8846.14,3433.54 h39.37 r270
U5: Bottom Overlay "STM32H7" at 7777.76,5458.21 h120
U6: Bottom Overlay "v 0.2" at 6491.3,1594.32 h60 r180
U8: Bottom Overlay "SDRAM" at 6713.08,2861.07 h60
U10: Bottom Overlay "E22(900M22S)" at 4634.41,1489.49 h31.5; Bottom Overlay "NSS" at 4434.41,1359.49 h25.59 r90; Bottom Overlay "SCK" at 4484.41,1359.49 h25.59 r90; Bottom Overlay "MOSI" at 4534.41,1384.49 h25.59 r90; Bottom Overlay "MISO" at 4589.41,1384.49 h25.59 r90; Bottom Overlay "NRST" at 4639.41,1384.49 h25.59 r90; Bottom Overlay "BUSY" at 4689.41,1384.49 h25.59 r90; Bottom Overlay "DIO1" at 4736.81,1373.15 h25.59 r90; Bottom Overlay "GND" at 4784.41,1359.49 h25.59 r90; Bottom Overlay "GND" at 4219.31,1360.12 h25.59 r90; Bottom Overlay "ANT" at 4168.96,1360.12 h25.59 r90; Bottom Overlay "GND" at 4118.61,1360.12 h25.59 r90; Bottom Overlay "GND" at 4118.61,1718.58 h25.59 r90; Bottom Overlay "GND" at 4168.96,1718.58 h25.59 r90; Bottom Overlay "GND" at 4219.31,1718.58 h25.59 r90; Bottom Overlay "GND" at 4788.39,1717.4 h25.59 r90; Bottom Overlay "GND" at 4736.81,1716.61 h25.59 r90; Bottom Overlay "VCC" at 4688.87,1717.4 h25.59 r90; Bottom Overlay "DIO2" at 4638.52,1717.4 h25.59 r90; Bottom Overlay "TXEN" at 4588.17,1717.4 h25.59 r90; Bottom Overlay "RXEN" at 4537.82,1717.4 h25.59 r90; Bottom Overlay "GND" at 4487.47,1717.4 h25.59 r90; Bottom Overlay "GND" at 4437.12,1717.4 h25.59 r90